# EAGLE board ORIGINAL (EAGLE 9.5.2)
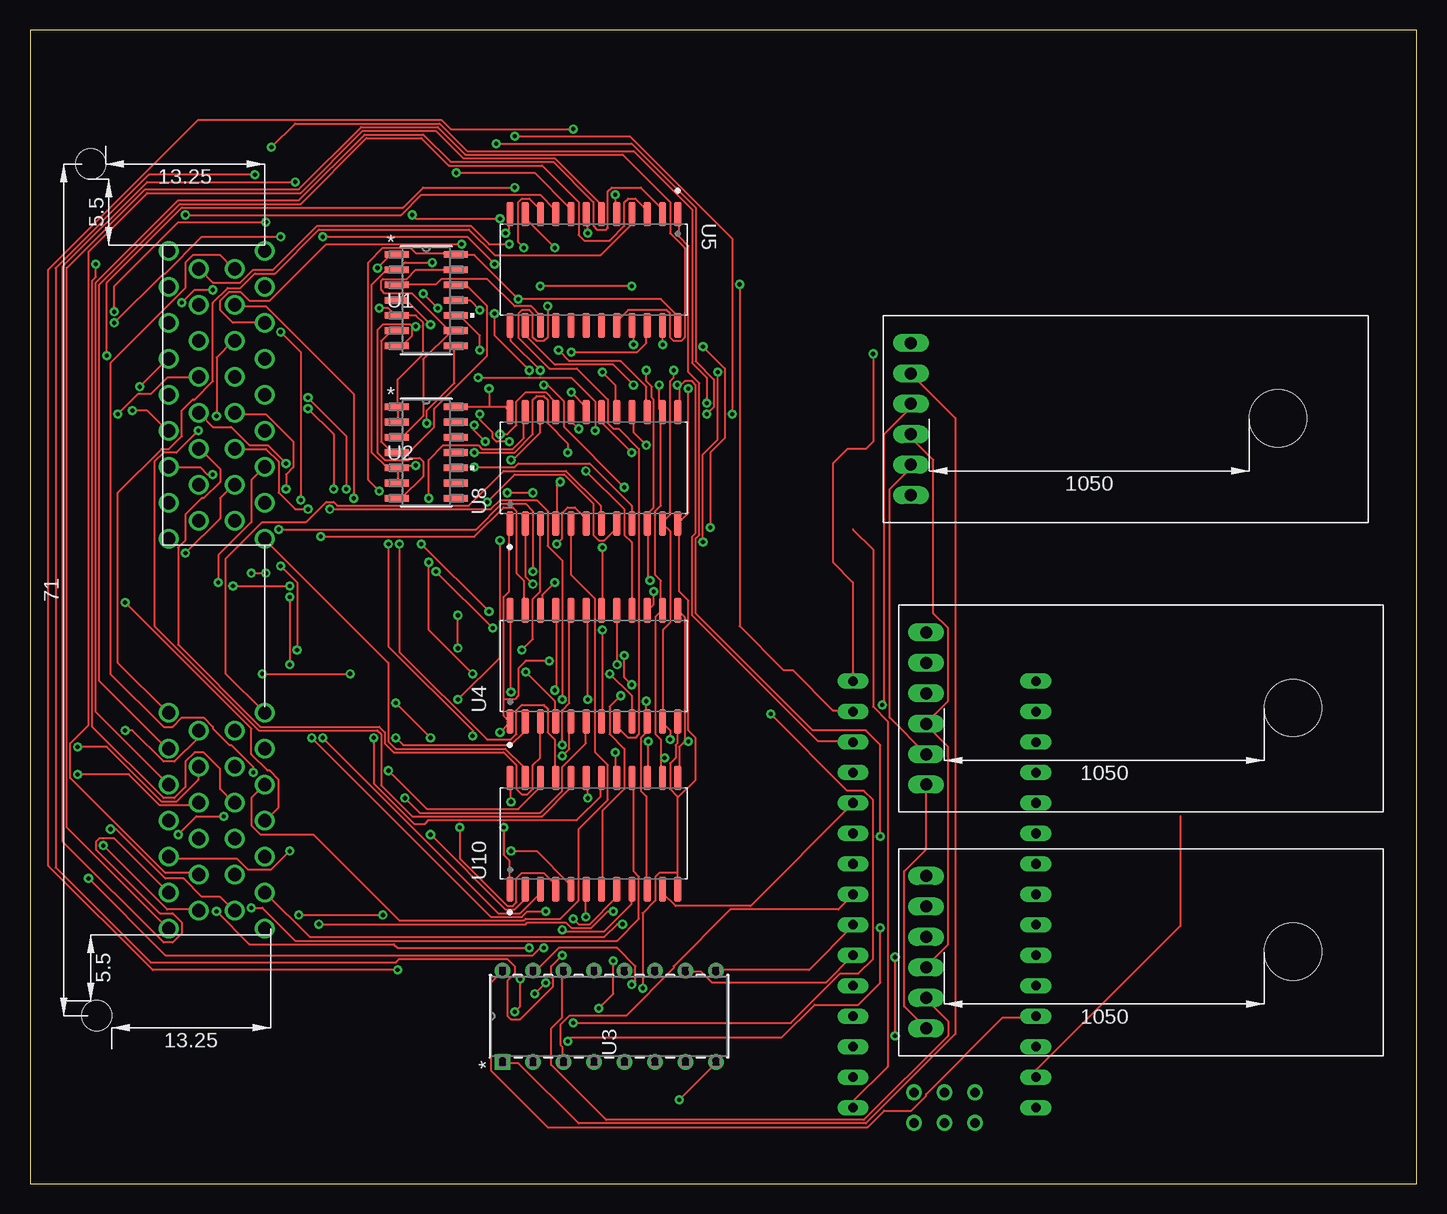
[diagram p0: board, top side]
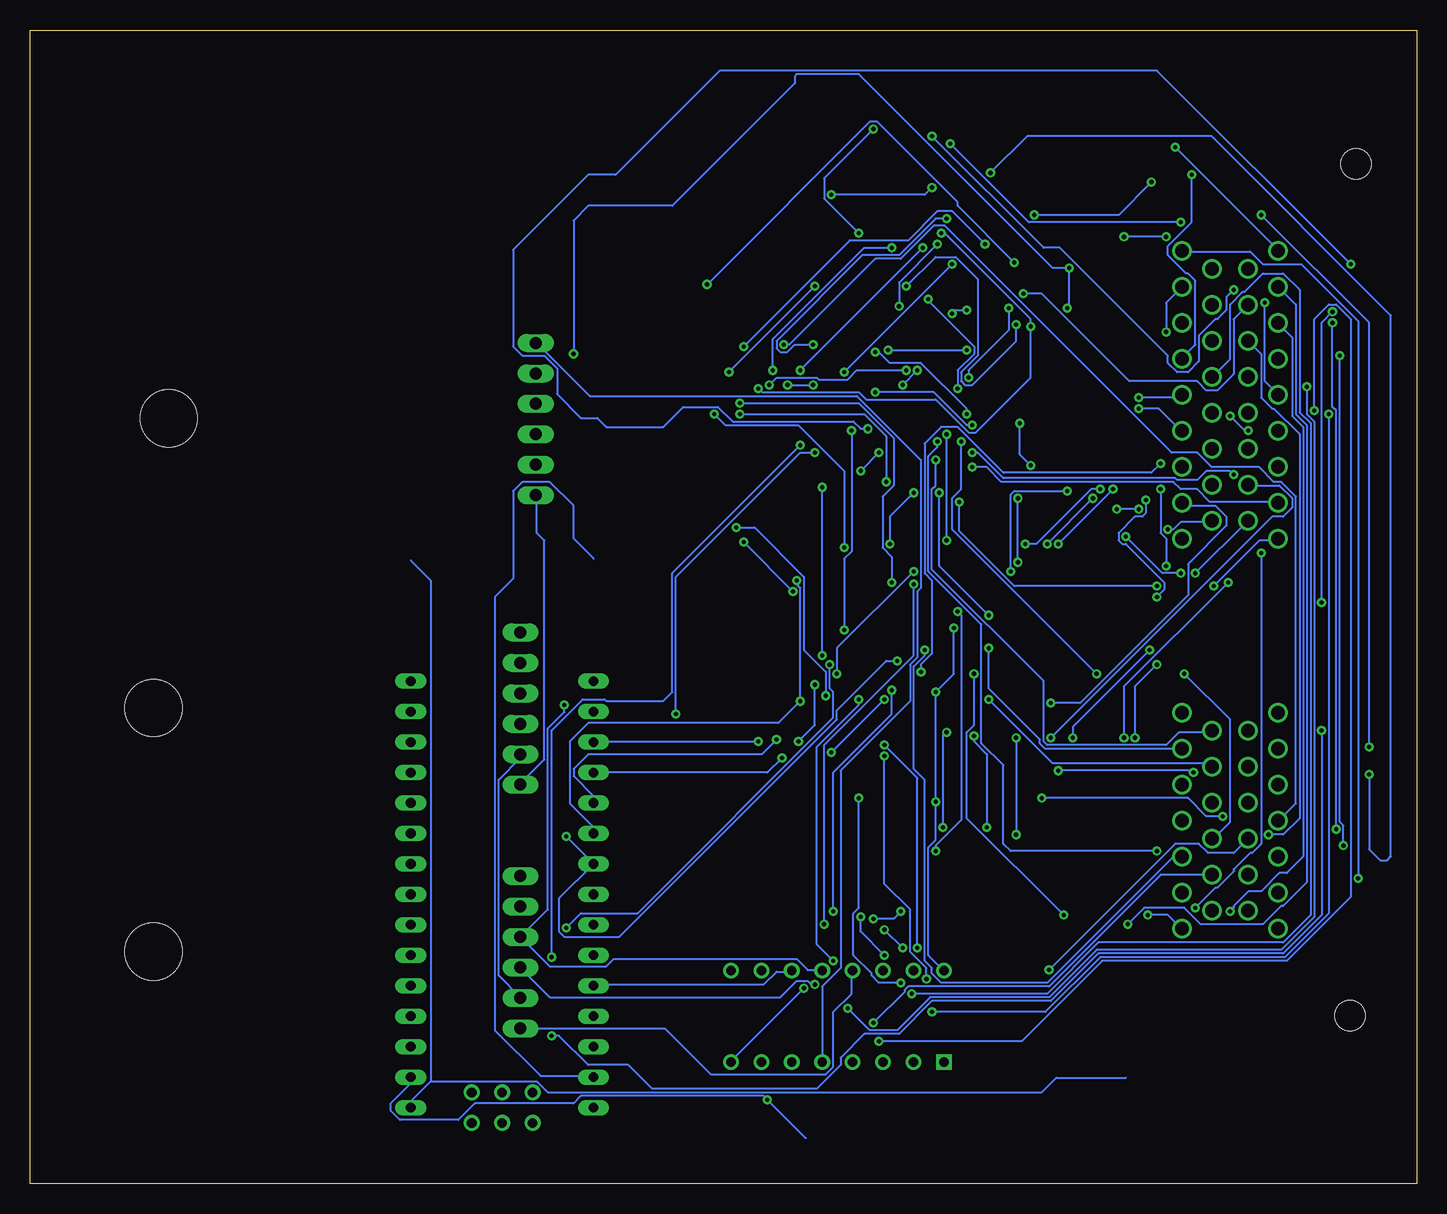
[diagram p1: board, bottom side, seen from below]

Size 115.55 x 96.19 mm. Coordinates in mm from the lower left corner, seen from the top.
Outline: 0,0 115.55,0 115.55,96.19 0,96.19 0,0
Copper layers (1*16): Top 0.035mm / dielectric 1.5mm / Bottom 0.035mm
Design rules "default": minimum track width 6mil, minimum drill 0.35mm, track to track 6mil, track to pad 6mil, pad to pad 6mil, via to via 6mil, smd to smd 6mil, copper to edge 40mil, drill to drill 6mil, minimum pad ring 10mil, minimum via ring 8mil, stop-mask expansion 4mil, vias tented up to drill 0mil, thermal gap 10mil

## Footprints (pad centres in the part's own frame; a part is rotated, then mirrored left to right if it is on the bottom)
D14 = smd 1.981 x 0.559: 1 -2.464,3.81; 2 -2.464,2.54; 3 -2.464,1.27; 4 -2.464,0; 5 -2.464,-1.27; 6 -2.464,-2.54; 7 -2.464,-3.81; 8 2.464,-3.81; 9 2.464,-2.54; 10 2.464,-1.27; 11 2.464,0; 12 2.464,1.27; 13 2.464,2.54; 14 2.464,3.81
N16 = drill 0.787 pad 1.295 square: 1 -7.62,17.78 | drill 0.787 pad 1.295: 2 -7.62,15.24; 3 -7.62,12.7; 4 -7.62,10.16; 5 -7.62,7.62; 6 -7.62,5.08; 7 -7.62,2.54; 8 -7.62,0; 9 0,0; 10 0,2.54; 11 0,5.08; 12 0,7.62; 13 0,10.16; 14 0,12.7; 15 0,15.24; 16 0,17.78
SOIC127P1030X265-24N = smd 2.06 x 0.6: 1 -4.64,6.985; 2 -4.64,5.715; 3 -4.64,4.445; 4 -4.64,3.175; 5 -4.64,1.905; 6 -4.64,0.635; 7 -4.64,-0.635; 8 -4.64,-1.905; 9 -4.64,-3.175; 10 -4.64,-4.445; 11 -4.64,-5.715; 12 -4.64,-6.985; 13 4.64,-6.985; 14 4.64,-5.715; 15 4.64,-4.445; 16 4.64,-3.175; 17 4.64,-1.905; 18 4.64,-0.635; 19 4.64,0.635; 20 4.64,1.905; 21 4.64,3.175; 22 4.64,4.445; 23 4.64,5.715; 24 4.64,6.985
NANO = drill 0.8 long: 3.3V -10.16,24.13; 5V -10.16,-1.27; A0 -10.16,19.05; A1 -10.16,16.51; A2 -10.16,13.97; A3 -10.16,11.43; A4 -10.16,8.89; A5 -10.16,6.35; A6 -10.16,3.81; A7 -10.16,1.27; AREF -10.16,21.59; D2 5.08,1.27; D3 5.08,3.81; D4 5.08,6.35; D5 5.08,8.89; D6 5.08,11.43; D7 5.08,13.97; D8 5.08,16.51; D9 5.08,19.05; D10 5.08,21.59; D11 5.08,24.13; D12 5.08,26.67; D13 -10.16,26.67; GND -10.16,-6.35; GND1 5.08,-1.27; RAW -10.16,-8.89; RST -10.16,-3.81; RST1 5.08,-3.81; RX1 5.08,-6.35; TX0 5.08,-8.89 | drill 0.8: ICSP1 -5.08,-10.16; ICSP2 -5.08,-7.62; ICSP3 -2.54,-10.16; ICSP4 -2.54,-7.62; ICSP5 0,-10.16; ICSP6 0,-7.62
DTM_CON_F = drill 1 long: 1 19.304,6.096; 2 19.304,3.556; 3 19.304,1.016; 4 19.304,-1.524; 5 19.304,-4.064; 6 19.304,-6.604 | hole 4.763: -11.278,-0.305
MOTEC_400_CON_F = drill 1.1: A1 13,-0.5; A2 10,-0.5; A3 7,-0.5; A4 4,-0.5; A5 1,-0.5; A6 -2,-0.5; A7 -5,-0.5; A8 -8,-0.5; A9 -11,-0.5; A10 11.5,2; A11 8.5,2; A12 5.5,2; A13 2.5,2; A14 -0.5,2; A15 -3.5,2; A16 -6.5,2; A17 -9.5,2; A18 11.5,5; A19 8.5,5; A20 5.5,5; A21 2.5,5; A22 -0.5,5; A23 -3.5,5; A24 -6.5,5; A25 -9.5,5; A26 13,7.5; A27 10,7.5; A28 7,7.5; A29 4,7.5; A30 1,7.5; A31 -2,7.5; A32 -5,7.5; A33 -8,7.5; A34 -11,7.5; B1 -25.5,-0.5; B2 -28.5,-0.5; B3 -31.5,-0.5; B4 -34.5,-0.5; B5 -37.5,-0.5; B6 -40.5,-0.5; B7 -43.5,-0.5; B8 -27,2; B9 -30,2; B10 -33,2; B11 -36,2; B12 -39,2; B13 -42,2; B14 -27,5; B15 -30,5; B16 -33,5; B17 -36,5; B18 -39,5; B19 -42,5; B20 -25.5,7.5; B21 -28.5,7.5; B22 -31.5,7.5; B23 -34.5,7.5; B24 -37.5,7.5; B25 -40.5,7.5; B26 -43.5,7.5 | hole 2.5: -50.75,13.5; 20.25,14

## Placement (x,y rotation side)
U1  CD4011BM96  [D14]  33.02,73.66 0 top
U2  CD4011BM96  [D14]  33.02,60.96 0 top
U3  SN74LV4051ANE4  [N16]  57.15,17.78 90 top
U4  CD74HC4067M96  [SOIC127P1030X265-24N]  46.99,43.18 90 top
U5  CD74HC4067M96  [SOIC127P1030X265-24N]  46.99,76.2 270 top
U8  CD74HC4067M96  [SOIC127P1030X265-24N]  46.99,59.69 90 top
U10  CD74HC4067M96  [SOIC127P1030X265-24N]  46.99,29.21 90 top
U$2  NANO  [NANO]  73.66,15.24 0 bottom
U$3  DTM_CON  [DTM_CON_F]  93.98,39.37 180 top
U$5  DTM_CON  [DTM_CON_F]  93.98,19.05 180 top
U$6  DTM_CON  [DTM_CON_F]  92.71,63.5 180 top
U$7  MOTEC_400_CON  [MOTEC_400_CON_F]  19.05,64.77 90 top

## Library data of the parts
U1 U2 = CD4011BM96; MANUFACTURER_PART_NUMBER: CD4011BM96; VENDOR: Texas Instruments
U3 = SN74LV4051ANE4; MANUFACTURER_PART_NUMBER: SN74LV4051ANE4; VENDOR: Texas Instruments
U4 U5 U8 U10 = CD74HC4067M96; AVAILABILITY: Unavailable; DESCRIPTION: High Speed CMOS 16-Channel Analog Multiplexer/Demultiplexer 24-SOIC -55 to 125; MF: Texas Instruments; MP: CD74HC4067M96; PACKAGE: SOIC-24 Texas Instruments; PRICE: None
U$2 = Arduino-clone
U$3 U$5-U$7 = ECU_CHECK_LIB

## Nets
5V2: U1.14 U2.14 U3.16 U4.24 U5.24 U8.24 U10.24 U$2.5V
8_COM: U3.3 U$2.D5
8_IO1: U3.13 U$3.1 U$5.1 U$6.1
8_IO2: U3.14 U$3.2 U$5.2 U$6.2
8_IO3: U3.15 U$3.3 U$5.3 U$6.3
8_IO4: U3.12 U$5.4 U$6.4
8_IO5: U3.1 U$6.5
8_IO6: U3.5 U$6.6
8_SEL_1: U3.11 U$2.D2
8_SEL_2: U3.10 U$2.D3
8_SEL_3: U3.9 U$2.D4
16_IN: U4.1 U5.1 U8.1 U10.1 U$2.D6
16_IO1: U10.9 U$7.A1
16_IO2: U10.8 U$7.A2
16_IO3: U10.7 U$7.A3
16_IO4: U10.6 U$7.A4
16_IO5: U10.5 U$7.A5
16_IO6: U10.4 U$7.A6
16_IO7: U10.3 U$7.A7
16_IO8: U10.2 U$7.A8
16_IO9: U10.23 U$7.A9
16_IO10: U10.22 U$7.A10
16_IO11: U10.21 U$7.A11
16_IO12: U10.20 U$7.A12
16_IO13: U10.19 U$7.A13
16_IO14: U10.18 U$7.A14
16_IO15: U10.17 U$7.A15
16_IO16: U10.16 U$7.A16
16_IO17: U4.9 U$7.A17
16_IO18: U4.8 U$7.A18
16_IO19: U4.7 U$7.A19
16_IO20: U4.6 U$7.A20
16_IO21: U4.5 U$7.A21
16_IO22: U4.4 U$7.A22
16_IO23: U4.3 U$7.A23
16_IO24: U4.2 U$7.A24
16_IO25: U4.23 U$7.A25
16_IO26: U4.22 U$7.A26
16_IO27: U4.21 U$7.A27
16_IO28: U4.20 U$7.A28
16_IO29: U4.19 U$7.A29
16_IO30: U4.18 U$7.A30
16_IO31: U4.17 U$7.A31
16_IO32: U4.16 U$7.A32
16_IO33: U8.9 U$7.A33
16_IO34: U8.8 U$7.A34
16_IO35: U8.7 U$7.B1
16_IO36: U8.6 U$7.B2
16_IO37: U8.5 U$7.B3
16_IO38: U8.4 U$7.B4
16_IO39: U8.3 U$7.B5
16_IO40: U8.2 U$7.B6
16_IO41: U8.23 U$7.B7
16_IO42: U8.22 U$7.B8
16_IO43: U8.21 U$7.B9
16_IO44: U8.20 U$7.B10
16_IO45: U8.19 U$7.B11
16_IO46: U8.18 U$7.B12
16_IO47: U8.17 U$7.B13
16_IO48: U8.16 U$7.B14
16_IO49: U5.9 U$7.B15
16_IO50: U5.8 U$7.B16
16_IO51: U5.7 U$7.B17
16_IO52: U5.6 U$7.B18
16_IO53: U5.5 U$7.B19
16_IO54: U5.4 U$7.B20
16_IO55: U5.3 U$7.B21
16_IO56: U5.2 U$7.B22
16_IO57: U5.23 U$7.B23
16_IO58: U5.22 U$7.B24
16_IO59: U5.21 U$7.B25
16_IO60: U5.20 U$7.B26
16_SEL_1: U4.10 U5.10 U8.10 U10.10 U$2.D7
16_SEL_2: U4.11 U5.11 U8.11 U10.11 U$2.D8
16_SEL_3: U4.14 U5.14 U8.14 U10.14 U$2.D9
16_SEL_4: U4.13 U5.13 U8.13 U10.13 U$2.D10
D11: U1.2 U1.8 U2.5 U2.6 U$2.D11
D12: U1.1 U1.5 U2.1 U2.2 U$2.D12
D12|D11: U1.11 U10.15
GND: U1.7 U2.7 U3.8 U4.12 U5.12 U8.12 U10.12 U$2.GND
GND_2: U3.7
NAND(D11,D12): U1.3 U5.15
NAND(D12,~D11): U1.4 U4.15
NAND(~D12,D11): U1.10 U8.15
RX: U$2.TX0
TX: U$2.RX1
VCC: U$2.RAW
~D11: U1.6 U1.12 U2.4
~D12: U1.9 U1.13 U2.3

## Tracks (layer width: path | path; a pad name or v marks a point on that pad's centre or on a via)
5V2  (via drill 0.35)
  Top 0.152: 38.25,64.77 39.62,64.77 39.93,64.47 U8.24 | 38.25,64.77 U2.14 | U5.24 53.95,71.63 53.95,72.39 52.58,73.76 v40.69,73.76 37.03,77.42 35.51,77.42 U1.14 35.36,77.57 32.16,77.57 31.7,78.03 29.41,78.03 28.19,76.81 28.19,58.67 v29.11,57.76 | v38.25,66.29 38.25,64.77 | v40.08,31.85 40.08,33.83 U10.24 | v40.08,41 40.08,47.7 U4.24 | U$2.5V 83.82,13.87 81.08,13.87 74.68,7.47 74.68,7.32 73.46,6.1 71.17,6.1 69.8,4.72 43.13,4.72 38.41,9.45 38.41,16.76 39.32,17.68 U3.16 | v38.56,46.33 v33.83,51.05
  Bottom 0.152: v38.25,66.29 38.25,67.82 36.88,69.19 36.88,69.8 40.69,73.61 v40.69,73.76 | U3.16 39.47,17.83 40.69,19.05 40.69,28.04 40.08,28.65 v40.08,31.85 v40.08,41 38.56,42.52 v38.56,46.33 | v29.11,57.76 33.53,57.76 33.83,57.45 v33.83,51.05
8_COM
  Top 0.152: U3.3 44.35,10.21 44.35,11.43 44.2,11.58 44.2,13.26 44.96,14.02 49.68,14.02 53.65,17.98 53.65,18.14 58.37,22.86 67.36,22.86 68.58,24.08 U$2.D5
8_IO1
  Top 0.152: U$3.1 74.68,27.89 72.85,26.06 72.85,14.78 U$5.1
  Bottom 0.152: U$5.1 62.64,12.95 58.83,9.14 49.23,9.14 48.62,9.75 48.62,14.33 47.09,15.85 47.09,17.68 U3.13 | U$6.1 73.3,57.3 73.3,54.25 72.69,53.65 72.69,35.36 74.68,33.38 U$3.1
8_IO2
  Top 0.152: U3.14 44.35,17.68 44.35,13.87 43.43,12.95 43.43,9.91 48.01,5.33 69.49,5.33 76.5,12.34 76.5,13.56 74.68,15.39 U$5.2 | U$3.2 71.63,38.86 71.63,57.91 73.3,59.59 73.3,59.89 U$6.2
  Bottom 0.152: U$3.2 74.68,35.51 76.5,33.68 76.5,17.37 74.68,15.54 U$5.2
8_IO3  (via drill 0.35)
  Top 0.152: v50.14,16.61 50.44,16.92 50.44,18.14 48.92,19.66 44.04,19.66 42.22,17.83 41.91,17.83 U3.15 | U$5.3 74.68,18.14 76.5,19.96 76.5,36.42 74.68,38.25 U$3.3 74.68,38.41 76.5,40.23 76.5,46.33 75.29,47.55 75.29,60.35 73.46,62.18 73.46,62.48 U$6.3
  Bottom 0.152: v50.14,16.61 50.44,16.61 50.75,16.92 51.66,16.92 53.03,15.54 72.24,15.54 74.68,17.98 U$5.3
8_IO4  (via drill 0.35)
  Top 0.152: v71.02,39.93 71.17,40.08 71.17,62.48 73.3,64.62 73.3,64.92 U$6.4
  Bottom 0.152: U3.12 49.53,17.83 50.75,17.83 51.66,18.75 66.9,18.75 67.51,18.14 72.24,18.14 U$5.4 72.39,22.86 72.39,37.95 71.02,39.32 v71.02,39.93
8_IO5
  Top 0.152: U$6.5 77.11,63.86 77.11,12.5 69.65,5.03 45.72,5.03 40.69,10.06 39.47,10.06 U3.1
8_IO6
  Bottom 0.152: U3.5 49.53,16.46 48.01,17.98 48.01,34.44 42.22,40.23 42.22,43.28 41.6,43.89 41.6,49.38 41.3,49.68 41.3,60.35 46.63,65.68 68.89,65.68 73.3,70.1 U$6.6
8_SEL_1
  Bottom 0.152: U3.11 52.12,17.68 53.34,17.68 54.41,16.61 68.58,16.61 U$2.D2
8_SEL_2
  Top 0.152: U$2.D3 66.29,16.76 56.84,16.76 55.93,17.68 54.71,17.68 U3.10
8_SEL_3
  Top 0.152: U3.9 57.15,17.83 64.92,17.83 68.58,21.49 U$2.D4
16_IN  (via drill 0.35)
  Top 0.152: v39.47,29.72 39.47,27.43 39.93,26.98 39.93,24.69 U10.1 | v39.17,37.64 39.93,38.41 U4.1 39.93,38.56 39.47,39.01 39.47,40.39 | 39.47,40.39 39.47,48.92 39.93,49.38 39.93,55.02 U8.1 | v70.87,28.96 70.87,36.58 69.65,37.8 65.23,37.8 55.47,47.55 55.47,53.8 55.78,54.1 55.78,66.75 54.86,67.67 54.86,78.18 54.1,78.94 54.1,80.77 U5.1 | 39.47,40.39 40.39,40.39 40.69,40.69 40.69,42.98 41.3,43.59 v43.28,43.59
  Bottom 0.152: v39.47,29.72 39.47,37.34 v39.17,37.64 | v70.87,28.96 U$2.D6 71.48,23.77 71.48,21.03 71.02,20.57 66.45,20.57 48.31,38.71 48.31,39.47 44.2,43.59 v43.28,43.59
16_IO1  (via drill 0.35)
  Top 0.152: v44.35,21.18 44.5,21.03 47.85,21.03 50.14,23.32 50.14,24.54 U10.9 | v42.82,19.66 42.52,19.66 41.91,19.05 11.28,19.05 v4.88,25.45
  Bottom 0.152: v42.82,19.66 v44.35,21.18 | v4.88,25.45 4.88,71.93 9.6,76.66 12.8,76.66 13.87,77.72 19.51,77.72 U$7.A1
16_IO2  (via drill 0.35)
  Top 0.152: v45.26,22.1 45.72,21.64 46.63,21.64 48.77,23.77 48.77,24.54 U10.8 | v42.98,22.71 41.45,22.71 41,22.25 38.41,22.25 v23.47,37.19 | v21.64,48.92 v21.64,43.28 | v22.55,57 22.55,69.34 v20.88,71.02
  Bottom 0.152: v45.26,22.1 43.59,22.1 v42.98,22.71 | v23.47,37.19 23.47,41.45 v21.64,43.28 | v21.64,48.92 21.03,49.53 21.03,50.14 24.23,53.34 24.54,53.34 24.84,53.65 24.84,54.25 23.47,55.63 22.86,55.63 22.55,55.93 v22.55,57 | v20.88,71.02 20.88,73.46 19.66,74.68 U$7.A2
16_IO3  (via drill 0.35)
  Top 0.152: v49.23,40.69 48.31,39.78 48.31,37.49 49.53,36.27 49.53,32.92 47.7,31.09 47.7,24.69 U10.7 | v56.69,54.71 56.69,60.96 57.91,62.18 57.91,67.97 v56.08,69.8 | v35.97,78.33 24.69,78.33 19.96,73.61 18.29,73.61 17.53,74.37 16.61,74.37 15.85,73.61 15.85,72.85 16.92,71.78 19.51,71.78 U$7.A3
  Bottom 0.152: v49.23,40.69 49.23,42.67 51.05,44.5 51.05,50.6 55.17,54.71 v56.69,54.71 | v56.08,69.8 47.24,78.64 42.37,78.64 39.93,81.08 38.71,81.08 v35.97,78.33
16_IO4  (via drill 0.35)
  Top 0.152: v46.33,22.25 46.33,24.54 U10.6 | v44.35,19.05 43.43,18.14 43.43,17.22 43.59,17.07 43.59,16.46 40.84,13.72 40.08,13.72 39.78,14.02 39.78,16.92 40.39,17.53 40.39,18.14 39.78,18.75 30.79,18.75 30.48,18.44 10.06,18.44 2.13,26.36 2.13,76.35 9.91,84.12 v18.75,84.12
  Bottom 0.152: v46.33,22.25 46.33,21.03 v44.35,19.05 | v18.75,84.12 18.75,80.16 20.73,78.18 20.73,77.42 19.2,75.89 19.05,75.89 18.44,75.29 18.44,69.95 19.51,68.89 U$7.A4
16_IO5  (via drill 0.35)
  Top 0.152: v40.08,27.74 42.22,27.74 44.96,24.99 44.96,24.69 U10.5 | v32.61,53.34 v38.25,47.7 | v26.36,57.91 26.36,62.33 v23.16,65.53
  Bottom 0.152: v40.08,27.74 40.08,28.19 37.95,30.33 37.95,47.4 v38.25,47.7 | v32.61,53.34 31.7,53.34 27.13,57.91 v26.36,57.91 | v23.16,65.53 19.81,65.53 19.66,65.68 U$7.A5
16_IO6  (via drill 0.35)
  Top 0.152: v35.81,29.72 35.81,27.13 39.78,23.16 40.23,23.16 40.54,23.47 40.54,25.45 41,25.91 42.82,25.91 43.74,24.99 43.74,24.69 U10.4 | v36.88,37.34 36.88,37.8 29.87,44.81 v29.87,53.34 | v25.3,57.91 25.3,62.48 v23.16,64.62
  Bottom 0.152: v35.81,29.72 35.81,35.81 36.88,36.88 v36.88,37.34 | v25.3,57.91 v29.87,53.34 | v23.16,64.62 21.49,64.62 19.66,62.79 U$7.A6
16_IO7  (via drill 0.35)
  Top 0.152: v24.38,37.19 39.01,22.55 40.84,22.55 42.52,24.23 42.52,24.54 U10.3 | v15.7,50.14 15.7,52.43 18.44,55.17 18.44,58.67 19.51,59.74 U$7.A7
  Bottom 0.152: v24.38,37.19 24.38,41.45 v15.7,50.14
16_IO8  (via drill 0.35)
  Top 0.152: v33.38,29.11 39.62,22.86 40.39,22.86 41.15,23.62 41.15,24.54 U10.2 | v30.48,40.08 v33.38,37.19
  Bottom 0.152: v33.38,37.19 v33.38,29.11 | v30.48,40.08 28.04,40.08 19.05,49.07 19.05,51.66 15.85,54.86 15.85,55.63 16.76,56.54 19.36,56.54 19.51,56.69 U$7.A8
16_IO9
  Top 0.152: U10.23 41.15,33.98 41.15,34.75 39.62,36.27 30.48,36.27 29.87,36.88 29.87,43.43 19.66,53.65 U$7.A9
16_IO10  (via drill 0.35)
  Top 0.152: v29.87,34.44 33.07,31.24 40.69,31.24 42.52,33.07 42.52,33.83 U10.22 | v18.59,34.29 18.59,34.75 16.76,36.58 16.61,36.58 15.24,37.95 15.24,38.1 14.48,38.86 12.65,38.86 11.89,38.1 11.12,38.1 6.71,42.52 6.71,68.43 12.95,74.68 12.95,76.81 13.56,77.42 15.85,77.42 16.92,76.35 U$7.A10
  Bottom 0.152: v29.87,34.44 18.75,34.44 v18.59,34.29
16_IO11  (via drill 0.35)
  Top 0.152: v30.79,53.34 30.79,44.35 38.1,37.03 40.08,37.03 40.54,37.49 40.54,39.47 41,39.93 42.82,39.93 43.13,39.62 43.13,37.64 43.74,37.03 43.74,33.98 U10.21 | v26.98,57.15 26.98,65.84 19.66,73.15 17.07,73.15 U$7.A11
  Bottom 0.152: v26.98,57.15 v30.79,53.34
16_IO12  (via drill 0.35)
  Top 0.152: v14.02,62.79 12.19,60.96 11.12,60.96 10.36,60.2 10.36,46.48 19.05,37.8 28.96,37.8 29.26,37.49 29.26,33.22 31.85,30.63 42.67,30.63 44.96,32.92 44.96,33.83 U10.20 | v15.54,64.01 15.54,68.89 16.92,70.26 U$7.A12
  Bottom 0.152: v14.02,62.79 14.33,62.79 v15.54,64.01
16_IO13  (via drill 0.35)
  Top 0.152: v46.48,32.16 46.48,33.83 U10.19 | v42.06,15.85 v42.98,16.76
  Bottom 0.152: v46.48,32.16 46.48,23.01 46.94,22.55 46.94,19.05 45.41,17.53 45.41,17.37 44.81,16.76 v42.98,16.76 | v42.06,15.85 30.79,15.85 26.52,20.12 11.12,20.12 8.84,22.4 8.84,63.4 9.75,64.31 9.75,74.52 11.12,75.89 12.8,75.89 14.33,74.37 14.48,74.37 15.54,73.3 15.54,68.73 16.92,67.36 U$7.A13
16_IO14  (via drill 0.35)
  Top 0.152: v28.65,37.19 28.65,33.38 32,30.02 32.92,30.02 33.22,30.33 45.57,30.33 47.55,32.31 47.55,33.83 U10.18 | v22.25,44.5 22.25,50.14 v20.88,51.51 | v21.34,57.91 21.34,59.13 21.95,59.74 21.95,61.87 19.66,64.16 17.07,64.16 U$7.A14
  Bottom 0.152: v28.65,37.19 28.65,38.1 v22.25,44.5 | v20.88,51.51 20.88,53.8 21.34,54.25 v21.34,57.91
16_IO15  (via drill 0.35)
  Top 0.152: v48.77,35.97 48.77,33.98 U10.17 | v44.35,40.39 44.35,51.97 43.13,53.19 43.13,56.08 42.22,57 39.17,57 38.41,56.24 v24.99,56.24 | v23.16,56.24 22.1,56.24 20.73,57.61 20.73,60.2 19.66,61.27 17.07,61.27 U$7.A15
  Bottom 0.152: v44.35,40.39 v48.77,35.97 | v23.16,56.24 v24.99,56.24
16_IO16  (via drill 0.35)
  Top 0.152: v18.44,23.01 19.36,23.01 22.1,20.27 48.92,20.27 50.75,22.1 50.75,25.6 50.29,26.06 50.29,33.83 U10.16 | v12.95,52.58 15.85,55.47 15.85,57.15 16.92,58.22 U$7.A16
  Bottom 0.152: v18.44,23.01 16.76,24.69 16.61,24.69 15.24,26.06 15.24,26.21 13.87,27.58 13.72,27.58 12.95,28.35 v12.95,52.58
16_IO17  (via drill 0.35)
  Top 0.152: v48.31,42.52 50.14,40.69 50.14,38.56 U4.9 | v41.91,51.05 41.91,56.08 41.3,56.69 39.32,56.69 37.19,54.56 v20.73,54.56
  Bottom 0.152: v48.31,42.52 48.31,44.65 v41.91,51.05 | v20.73,54.56 20.27,54.56 19.66,55.17 17.07,55.17 U$7.A17
16_IO18  (via drill 0.35)
  Top 0.152: v43.13,73.15 43.13,70.56 42.82,70.26 42.22,70.26 41.91,70.56 41.91,72.54 41.6,72.85 41,72.85 40.69,72.54 40.69,70.56 43.28,67.97 45.57,67.97 48.16,65.38 48.16,63.4 48.62,62.94 49.07,62.94 50.75,61.27 50.75,37.49 50.44,37.19 49.84,37.19 48.92,38.1 48.92,38.41 U4.8 | v39.93,78.33 38.25,78.33 36.73,79.86 23.93,79.86 20.27,76.2 18.59,76.2 17.53,75.13 15.24,75.13 14.17,76.2 U$7.A18
  Bottom 0.152: v43.13,73.15 43.13,75.13 v39.93,78.33
16_IO19  (via drill 0.35)
  Top 0.152: v47.7,46.18 47.7,38.56 U4.7 | v47.09,62.79 47.09,65.23 45.11,67.21 v37.34,67.21 | v32.77,74.22 v33.98,73
  Bottom 0.152: v47.7,46.18 47.7,52.12 47.09,52.73 v47.09,62.79 | v37.34,67.21 37.34,67.82 33.98,71.17 v33.98,73 | v32.77,74.22 31.24,74.22 23.93,66.9 18.29,66.9 17.53,66.14 16.61,66.14 15.24,67.51 15.24,72.08 14.17,73.15 U$7.A19
16_IO20  (via drill 0.35)
  Top 0.152: v31.24,32.16 32.46,30.94 42.52,30.94 44.35,32.77 44.35,34.75 46.33,36.73 46.33,38.41 U4.6 | v16.15,30.63 13.87,30.63 v12.34,29.11
  Bottom 0.152: v31.24,32.16 19.05,32.16 17.53,30.63 v16.15,30.63 | v12.34,29.11 11.12,29.11 9.75,30.48 9.75,62.48 11.89,64.62 12.04,64.62 12.95,65.53 12.95,69.19 14.02,70.26 U$7.A20
16_IO21  (via drill 0.35)
  Top 0.152: v44.35,35.66 44.96,36.27 44.96,38.41 U4.5 | v40.84,17.07 40.84,14.78 v40.39,14.33 | v7.32,64.16 8.99,65.84 10.06,65.84 11.43,67.21 14.02,67.21 U$7.A21
  Bottom 0.152: v44.35,35.66 44.35,24.99 42.22,22.86 42.22,19.36 40.84,17.98 v40.84,17.07 | v40.39,14.33 30.94,14.33 26.36,18.9 10.97,18.9 7.32,22.55 v7.32,64.16
16_IO22  (via drill 0.35)
  Top 0.152: v41.3,42.67 43.74,40.23 43.74,38.56 U4.4 | v21.34,60.05 19.81,61.57 18.29,61.57 16.76,63.09 15.24,63.09 14.17,64.16 U$7.A22
  Bottom 0.152: v41.3,42.67 41.3,43.28 40.39,44.2 40.39,50.29 41,50.9 41,61.72 39.62,63.09 38.25,63.09 34.44,59.28 22.1,59.28 v21.34,60.05
16_IO23
  Top 0.152: U4.3 42.52,38.41 42.52,35.51 41.91,34.9 41.91,32.92 41.45,32.46 41,32.46 40.54,32.92 40.54,34.9 39.47,35.97 30.33,35.97 29.57,36.73 29.57,37.64 29.11,38.1 19.2,38.1 12.34,44.96 12.34,53.03 12.95,53.65 12.95,55.78 14.33,57.15 14.48,57.15 15.85,58.52 15.85,59.59 14.17,61.27 U$7.A23
16_IO24  (via drill 0.35)
  Top 0.152: v30.48,37.19 31.09,36.58 40.08,36.58 41.15,37.64 41.15,38.41 U4.2
  Bottom 0.152: v30.48,37.19 12.04,55.63 11.12,55.63 10.36,56.39 10.36,57.15 11.43,58.22 14.02,58.22 U$7.A24
16_IO25  (via drill 0.35)
  Top 0.152: v24.23,53.95 37.03,53.95 39.47,56.39 40.23,56.39 40.54,56.08 40.54,50.9 41.15,50.29 41.15,47.85 U4.23 | v18.44,50.9 v19.66,50.9
  Bottom 0.152: v24.23,53.95 21.18,50.9 v19.66,50.9 | v18.44,50.9 14.17,55.17 U$7.A25
16_IO26  (via drill 0.35)
  Top 0.152: v43.74,50.14 42.67,49.07 42.67,47.85 U4.22 | v56.39,65.08 56.39,67.21 55.17,68.43 55.17,81.23 50.29,86.11 36.42,86.11 34.14,88.39 22.1,88.39 v20.12,86.41
  Bottom 0.152: v43.74,50.14 43.74,52.27 44.5,53.03 44.5,57.3 43.59,58.22 43.59,62.18 46.48,65.08 v56.39,65.08 | v20.12,86.41 11.58,77.88 U$7.A26
16_IO27  (via drill 0.35)
  Top 0.152: v43.74,41.15 43.89,41.3 43.89,47.7 U4.21 | v48.62,22.71 48.16,22.71 46.79,21.34 45.11,21.34 44.65,21.79 41.45,21.79 41.3,21.64 v24.08,21.64
  Bottom 0.152: v43.74,41.15 43.74,39.17 48.62,34.29 v48.62,22.71 | v24.08,21.64 22.71,23.01 19.36,23.01 17.98,21.64 12.8,21.64 11.28,23.16 11.12,23.16 9.14,25.15 9.14,63.25 10.06,64.16 10.06,73.3 11.43,74.68 U$7.A27
16_IO28  (via drill 0.35)
  Top 0.152: v44.35,36.58 44.35,39.47 44.96,40.08 44.96,47.7 U4.20 | v41.6,19.66 30.63,19.66 30.33,19.96 18.29,19.96 v15.54,22.71
  Bottom 0.152: v44.35,36.58 41.6,33.83 v41.6,19.66 | v15.54,22.71 15.24,23.01 15.24,23.16 14.02,24.38 12.95,24.38 11.43,25.91 10.82,25.91 9.45,27.28 9.45,63.09 10.36,64.01 10.36,70.56 11.43,71.63 U$7.A28
16_IO29  (via drill 0.35)
  Top 0.152: v46.48,40.39 46.48,47.7 U4.19 | v48.62,18.59 48.62,15.85 v47.4,14.63 | v9.14,66.45 11.43,68.73 U$7.A29
  Bottom 0.152: v46.48,40.39 46.48,39.93 49.99,36.42 49.99,19.96 v48.62,18.59 | v47.4,14.63 45.57,12.8 43.28,12.8 40.54,15.54 30.63,15.54 26.67,19.51 11.28,19.51 8.53,22.25 8.53,63.55 9.14,64.16 v9.14,66.45
16_IO30  (via drill 0.35)
  Top 0.152: v47.7,53.03 47.7,47.85 U4.18 | v58.52,64.16 58.52,78.79 49.99,87.33 v40.39,87.33 | v15.24,74.52 13.72,74.52 v12.65,73.46
  Bottom 0.152: v47.7,53.03 47.7,59.44 51.51,63.25 57.61,63.25 v58.52,64.16 | v40.39,87.33 31.09,78.03 29.72,78.03 20.73,69.04 20.73,68.43 19.96,67.67 19.05,67.67 18.14,68.58 18.14,70.71 16.76,72.08 16.61,72.08 15.85,72.85 15.85,73.91 v15.24,74.52 | v12.65,73.46 12.65,66.9 11.58,65.84 U$7.A30
16_IO31  (via drill 0.35)
  Top 0.152: v48.92,43.28 48.92,47.7 U4.17 | v70.87,21.34 70.87,16.76 69.04,14.94 65.38,14.94 62.64,12.19 45.11,12.19 v44.81,11.89 | v8.53,64.47 9.75,64.47 11.43,62.79 U$7.A31
  Bottom 0.152: v48.92,43.28 48.92,41.3 48.62,41 48.62,38.86 64.92,22.55 69.65,22.55 v70.87,21.34 | v44.81,11.89 32.92,11.89 26.21,18.59 10.82,18.59 5.49,23.93 5.49,72.08 6.71,73.3 7.32,73.3 8.53,72.08 v8.53,64.47
16_IO32  (via drill 0.35)
  Top 0.152: v46.33,59.44 49.53,56.24 49.53,54.1 50.14,53.49 50.14,47.85 U4.16 | v44.81,60.96 44.81,61.72 43.13,63.4 43.13,65.38 42.82,65.68 42.22,65.68 41.91,65.38 41.91,62.48 40.39,60.96 v37.03,60.96 | v15.24,59.13 14.78,59.13 14.17,59.74 11.58,59.74 U$7.A32
  Bottom 0.152: v44.81,60.96 v46.33,59.44 | v37.03,60.96 36.58,60.96 34.44,58.83 20.12,58.83 19.96,58.67 18.29,58.67 17.53,59.44 15.54,59.44 v15.24,59.13
16_IO33  (via drill 0.35)
  Top 0.152: v37.03,59.74 40.39,59.74 40.69,60.05 46.63,60.05 50.14,56.54 50.14,55.17 U8.9
  Bottom 0.152: v37.03,59.74 35.81,59.74 34.59,58.52 20.27,58.52 19.66,57.91 18.29,57.91 17.22,56.84 11.58,56.84 U$7.A33
16_IO34  (via drill 0.35)
  Top 0.152: v38.1,56.84 40.39,59.13 44.5,59.13 46.94,56.69 46.94,54.1 47.4,53.65 47.85,53.65 48.77,54.56 48.77,55.02 U8.8 | v16.92,49.84 v21.64,49.84
  Bottom 0.152: v38.1,56.84 38.1,54.41 33.53,49.84 v21.64,49.84 | v16.92,49.84 13.11,53.65 11.58,53.65 U$7.A34
16_IO35
  Top 0.152: U8.7 47.55,55.17 47.55,56.54 44.65,59.44 39.47,59.44 36.58,56.54 25.6,56.54 25.3,56.84 24.69,56.84 23.01,55.17 19.36,55.17 16.31,52.12 16.31,42.52 19.51,39.32 U$7.B1
16_IO36  (via drill 0.35)
  Top 0.152: v43.89,53.34 44.35,53.8 44.35,55.93 44.81,56.39 45.41,56.39 46.33,55.47 46.33,55.17 U8.6 | v39.78,57.61 v41.91,57.61 | v35.66,44.65 v35.66,47.4
  Bottom 0.152: v43.89,53.34 43.89,55.63 v41.91,57.61 | v39.78,57.61 39.78,51.51 v35.66,47.4 | v35.66,44.65 35.66,41.3 31.39,37.03 31.39,36.73 30.94,36.27 19.66,36.27 U$7.B2
16_IO37
  Top 0.152: U8.5 45.11,55.02 45.11,50.75 47.09,48.77 47.09,35.97 48.16,34.9 48.16,32 45.72,29.57 45.72,23.62 44.2,22.1 41.3,22.1 41.15,21.95 30.79,21.95 23.62,29.11 19.2,29.11 18.44,29.87 18.44,32.16 19.51,33.22 U$7.B3
16_IO38  (via drill 0.35)
  Top 0.152: v44.2,58.52 43.89,58.22 43.89,55.17 U8.4 | v56.39,64.16 57,64.77 57,67.06 55.47,68.58 55.47,81.38 50.14,86.72 v38.86,86.72 | v19.66,80.16 12.34,80.16 7.01,74.83 v7.01,72.69 | v7.92,48.46 18.44,37.95 18.44,35.81 19.81,34.44 19.96,34.44 20.73,33.68 20.73,31.39 19.66,30.33 U$7.B4
  Bottom 0.152: v44.2,58.52 44.2,62.33 46.02,64.16 v56.39,64.16 | v38.86,86.72 32.31,80.16 v19.66,80.16 | v7.01,72.69 7.92,71.78 v7.92,48.46
16_IO39  (via drill 0.35)
  Top 0.152: v41,44.5 41.91,45.41 41.91,48.77 42.52,49.38 42.52,55.02 U8.3
  Bottom 0.152: v41,44.5 41,44.04 41.91,43.13 41.91,34.59 41,33.68 41,18.59 40.39,17.98 40.39,17.53 39.62,16.76 30.79,16.76 20.42,27.13 19.66,27.13 U$7.B5
16_IO40  (via drill 0.35)
  Top 0.152: v41.91,49.99 41.3,50.6 41.3,55.02 U8.2 | v49.38,21.64 48.92,21.64 47.85,20.57 23.32,20.57 19.66,24.23 U$7.B6
  Bottom 0.152: v41.91,49.99 41.91,44.04 49.38,36.58 v49.38,21.64
16_IO41  (via drill 0.35)
  Top 0.152: v33.22,57.15 33.22,60.35 34.44,61.57 37.34,61.57 37.64,61.27 40.23,61.27 41.15,62.18 41.15,64.31 U8.23 | v33.22,51.82 33.22,46.18 v36.88,42.52 | v22.4,22.4 v29.41,22.4
  Bottom 0.152: v33.22,51.82 v33.22,57.15 | v36.88,42.52 36.88,38.25 37.49,37.64 37.49,30.48 v29.41,22.4 | v22.4,22.4 20.73,22.4 19.66,21.34 U$7.B7
16_IO42  (via drill 0.35)
  Top 0.152: v40.08,60.35 40.23,60.35 42.52,62.64 42.52,64.31 U8.22
  Bottom 0.152: v40.08,60.35 40.08,58.22 40.39,57.91 40.39,51.21 31.09,41.91 31.09,36.88 30.79,36.58 20.88,36.58 19.81,37.64 17.07,37.64 U$7.B8
16_IO43  (via drill 0.35)
  Top 0.152: v39.17,62.48 39.78,62.48 40.54,63.25 40.54,65.23 41.3,65.99 42.98,65.99 43.74,65.23 43.74,64.47 U8.21 | v39.17,53.65 39.17,43.89 v35.66,40.39
  Bottom 0.152: v39.17,53.65 v39.17,62.48 | v35.66,40.39 30.33,35.05 17.22,35.05 17.07,34.9 U$7.B9
16_IO44  (via drill 0.35)
  Top 0.152: v45.72,62.94 45.11,63.55 45.11,64.31 U8.20 | v5.49,76.66 5.49,75.59 5.18,75.29 5.18,38.1 11.12,32.16 12.04,32.16 12.95,33.07 12.95,35.2 13.72,35.97 14.48,35.97 15.85,34.59 15.85,32.92 16.92,31.85 U$7.B10
  Bottom 0.152: v45.72,62.94 46.33,62.94 46.94,63.55 57,63.55 58.22,64.77 61.11,64.77 62.79,63.09 67.51,63.09 68.28,63.86 69.65,63.86 71.63,65.84 71.63,67.97 72.69,69.04 74.52,69.04 75.29,69.8 75.29,77.88 69.04,84.12 66.75,84.12 58.06,92.81 21.64,92.81 v5.49,76.66
16_IO45  (via drill 0.35)
  Top 0.152: v45.11,65.99 46.33,64.77 46.33,64.47 U8.19 | v37.03,63.25 37.03,62.79 v37.95,61.87 | v19.36,42.52 v26.67,42.52
  Bottom 0.152: v45.11,65.99 40.23,65.99 37.49,63.25 v37.03,63.25 | v37.95,61.87 37.95,57.91 38.71,57.15 38.71,54.56 v26.67,42.52 | v19.36,42.52 15.54,38.71 15.54,30.18 16.92,28.8 U$7.B11
16_IO46  (via drill 0.35)
  Top 0.152: v50.14,60.96 47.7,63.4 47.7,64.31 U8.18 | v61.72,39.17 68.12,32.77 69.49,32.77 70.26,32 70.26,18.75 69.04,17.53 67.51,17.53 63.4,13.41 v45.26,13.41
  Bottom 0.152: v50.14,60.96 51.36,60.96 61.72,50.6 v61.72,39.17 | v45.26,13.41 42.67,16 42.67,16.15 42.37,16.46 30.63,16.46 21.34,25.76 17.07,25.76 U$7.B12
16_IO47  (via drill 0.35)
  Top 0.152: v47.7,67.67 48.77,66.6 48.77,64.47 U8.17 | v38.71,76.66 36.42,78.94 v24.38,78.94 | v20.88,78.94 14.33,78.94 11.28,75.89 11.12,75.89 v7.01,71.78 | v6.71,29.57 7.16,29.57 11.28,25.45 12.8,25.45 14.33,23.93 15.85,23.93 16.92,22.86 U$7.B13
  Bottom 0.152: v38.71,76.66 v47.7,67.67 | v20.88,78.94 v24.38,78.94 | v7.01,71.78 7.01,64.77 6.71,64.47 v6.71,29.57
16_IO48  (via drill 0.35)
  Top 0.152: v51.36,61.57 50.29,62.64 50.29,64.31 U8.16 | v72.08,12.34 v72.08,18.9 | v7.92,37.8 8.53,37.8 11.12,35.2 12.04,35.2 14.02,37.19 14.02,37.64 U$7.B14
  Bottom 0.152: v51.36,61.57 62.03,50.9 62.03,41 62.79,40.23 67.51,40.23 67.67,40.39 69.49,40.39 72.08,37.8 v72.08,18.9 | v72.08,12.34 71.48,12.34 69.04,9.91 65.68,9.91 63.7,7.92 49.99,7.92 48.01,9.91 48.01,10.52 46.02,12.5 43.13,12.5 40.39,15.24 30.48,15.24 26.52,19.2 11.12,19.2 7.92,22.4 v7.92,37.8
16_IO49  (via drill 0.35)
  Top 0.152: v12.95,80.77 30.94,80.77 32.61,82.45 42.52,82.45 43.74,81.23 43.74,80.92 U5.9 | v3.96,36.42 6.4,36.42 10.97,31.85 12.19,31.85 14.02,33.68 14.02,34.75 U$7.B15
  Bottom 0.152: v12.95,80.77 3.96,71.78 v3.96,36.42
16_IO50  (via drill 0.35)
  Top 0.152: v35.51,84.28 42.06,84.28 44.96,81.38 44.96,80.92 U5.8 | v3.96,34.14 8.23,34.14 10.82,31.55 13.87,31.55 14.02,31.7 U$7.B16
  Bottom 0.152: v35.51,84.28 32.46,87.33 17.07,87.33 2.13,72.39 2.13,27.28 2.44,26.98 3.05,26.98 3.96,27.89 v3.96,34.14
16_IO51  (via drill 0.35)
  Top 0.152: v46.48,79.25 46.48,80.77 U5.7 | v45.26,87.94 35.05,87.94 34.29,88.7 14.02,88.7 1.52,76.2 1.52,26.52 10.21,17.83 v30.63,17.83
  Bottom 0.152: v46.48,79.25 49.38,82.14 49.38,83.82 v45.26,87.94 | v30.63,17.83 20.12,28.35 18.14,28.35 17.37,27.58 15.24,27.58 14.17,28.65 U$7.B17
16_IO52
  Top 0.152: U5.6 47.55,80.92 47.55,81.69 43.74,85.5 36.12,85.5 33.83,87.78 27.74,87.78 22.55,82.6 9.75,82.6 4.88,77.72 4.88,38.25 3.35,36.73 3.35,33.83 11.28,25.91 14.02,25.91 U$7.B18
16_IO53  (via drill 0.35)
  Top 0.152: v48.77,82.45 48.77,80.92 U5.5 | v40.39,83.06 32.77,83.06 31.09,81.38 12.65,81.38 6.4,75.13 v6.4,69.04 | v6.1,28.19 11.43,22.86 14.02,22.86 U$7.B19
  Bottom 0.152: v48.77,82.45 41,82.45 v40.39,83.06 | v6.4,69.04 6.4,30.18 6.1,29.87 v6.1,28.19
16_IO54
  Top 0.152: U5.4 50.14,80.77 50.14,80.01 47.55,77.42 38.71,77.42 36.58,79.55 24.08,79.55 20.42,75.89 18.75,75.89 17.53,74.68 16.46,74.68 15.24,73.46 15.24,66.9 13.72,65.38 13.56,65.38 12.65,64.47 12.65,62.33 11.58,61.27 10.97,61.27 7.32,57.61 7.32,43.43 11.43,39.32 U$7.B20
16_IO55
  Top 0.152: U5.3 51.36,80.92 51.36,81.23 50.44,82.14 49.84,82.14 49.53,81.84 49.53,79.86 48.31,78.64 46.18,78.64 45.72,79.1 45.72,81.84 42.67,84.89 34.9,84.89 32.61,87.17 28.04,87.17 22.55,81.69 12.5,81.69 5.79,74.98 5.79,41.91 11.43,36.27 U$7.B21
16_IO56
  Top 0.152: U5.2 52.58,80.92 52.58,81.38 50.9,83.06 48.46,83.06 48.16,82.75 48.16,79.7 48.01,79.55 47.24,79.55 46.94,79.86 46.94,81.84 43.59,85.19 35.05,85.19 32.77,87.48 27.89,87.48 22.4,81.99 12.34,81.99 5.49,75.13 5.49,39.32 11.43,33.38 U$7.B22
16_IO57  (via drill 0.35)
  Top 0.152: v52.73,69.95 52.73,71.48 U5.23
  Bottom 0.152: v52.73,69.95 52.27,69.95 45.11,77.11 42.98,77.11 40.23,79.86 39.32,79.86 20.42,60.96 18.29,60.96 17.07,59.74 13.11,59.74 11.89,58.52 11.28,58.52 10.06,57.3 10.06,31.7 11.43,30.33 U$7.B23
16_IO58  (via drill 0.35)
  Top 0.152: v45.11,69.34 50.6,69.34 51.36,70.1 51.36,71.48 U5.22 | v37.49,64.16 37.49,63.7 38.56,62.64 38.56,62.18 38.86,61.87 v39.93,61.87 | v21.64,27.74 20.12,26.21 18.14,26.21 17.22,27.13 11.58,27.13 U$7.B24
  Bottom 0.152: v45.11,69.34 44.81,69.34 43.89,68.43 41.3,68.43 37.49,64.62 v37.49,64.16 | v39.93,61.87 39.93,61.42 40.69,60.66 40.69,51.05 36.27,46.63 36.27,36.73 34.44,34.9 34.44,28.35 33.83,27.74 v21.64,27.74
16_IO59  (via drill 0.35)
  Top 0.152: v50.29,69.95 50.29,71.48 U5.21 | v39.17,80.47 32.16,80.47 v31.85,80.77 | v22.1,83.52 9.75,83.52 2.74,76.5 2.74,28.5 11.12,20.12 11.89,20.12 12.65,20.88 12.65,21.79 11.89,22.55 10.82,22.55 5.49,27.89 5.49,28.5 5.79,28.8 7.01,28.8 11.43,24.38 U$7.B25
  Bottom 0.152: v50.29,69.95 51.82,69.95 52.43,69.34 53.03,69.34 53.34,69.65 53.34,70.26 46.18,77.42 43.13,77.42 40.08,80.47 v39.17,80.47 | v31.85,80.77 24.84,80.77 v22.1,83.52
16_IO60
  Top 0.152: U5.20 48.92,71.63 48.92,71.93 49.84,72.85 53.03,72.85 53.34,72.54 53.34,70.56 53.65,70.26 54.25,70.26 54.56,70.56 54.56,78.03 53.34,79.25 53.34,81.84 49.38,85.8 36.27,85.8 33.98,88.09 27.58,88.09 22.4,82.91 9.6,82.91 3.05,76.35 3.05,29.72 11.43,21.34 U$7.B26
16_SEL_1  (via drill 0.35)
  Top 0.152: U10.10 51.36,24.69 51.36,32.31 50.9,32.77 50.9,37.19 51.36,37.64 51.36,38.41 U4.10 51.36,38.56 v51.36,40.23 | v51.66,50.29 51.51,50.44 51.51,55.02 U8.10 51.51,55.17 51.51,55.93 51.97,56.39 51.97,65.38 51.82,65.53 51.82,66.45 51.36,66.9 v51.36,67.82 | v41.15,78.03 40.69,78.49 40.69,81.84 41,82.14 41.6,82.14 42.52,81.23 42.52,80.92 U5.10
  Bottom 0.152: v51.66,50.29 51.66,49.99 51.36,49.68 v51.36,40.23 53.19,38.41 69.04,38.41 70.56,36.88 70.56,31.7 68.58,29.72 U$2.D7 | v51.36,67.82 v41.15,78.03
16_SEL_2  (via drill 0.35)
  Top 0.152: U10.11 52.73,24.54 52.73,24.23 53.8,23.16 60.05,23.16 68.58,31.7 U$2.D8 | v43.74,78.03 41.3,80.47 41.3,80.77 U5.11 | v53.65,67.82 53.65,67.21 53.34,66.9 53.34,55.78 52.73,55.17 U8.11 52.73,55.02 53.34,54.41 53.34,46.79 52.73,46.18 52.73,38.56 U4.11 52.73,38.41 53.34,37.8 v53.34,37.03
  Bottom 0.152: v43.74,78.03 46.02,78.03 53.65,70.41 v53.65,67.82 | U$2.D8 68.58,32.31 70.26,33.98 70.26,34.59 69.04,35.81 54.56,35.81 v53.34,37.03
16_SEL_3  (via drill 0.35)
  Top 0.152: 52.58,35.51 52.58,37.03 52.12,37.49 52.12,47.24 52.58,47.7 U4.14 52.58,47.85 52.58,50.29 52.12,50.75 52.12,56.08 52.58,56.54 52.58,64.31 U8.14 52.58,64.47 52.43,64.62 v52.43,66.6 | 52.58,35.51 52.58,33.98 U10.14 | v50.29,66.6 48.62,68.28 43.74,68.28 41.3,70.71 41.3,71.48 U5.14 | 52.58,35.51 v52.88,35.51
  Bottom 0.152: v52.43,66.6 v50.29,66.6 | U$2.D9 54.1,34.29 v52.88,35.51
16_SEL_4  (via drill 0.35)
  Top 0.152: 54.56,36.88 54.1,36.42 54.1,33.98 U10.13 | 54.56,36.88 54.56,47.24 54.1,47.7 U4.13 | 54.1,66.45 54.1,64.47 U8.13 | 54.1,66.45 54.56,66.9 55.17,66.9 55.47,66.6 55.47,54.25 55.17,53.95 55.17,47.4 65.68,36.88 68.58,36.88 U$2.D10 | v42.52,67.82 40.08,70.26 40.08,71.48 U5.13 | 54.1,66.45 v53.95,66.6 | v54.86,36.88 54.56,36.88
  Bottom 0.152: v42.52,67.82 46.63,67.82 47.4,67.06 49.84,67.06 49.99,67.21 53.34,67.21 v53.95,66.6 | v54.86,36.88 68.58,36.88 U$2.D10
D11  (via drill 0.35)
  Top 0.152: U2.6 30.63,58.52 30.63,59.59 U2.5 | v33.07,63.4 33.07,64.47 35.36,66.75 35.36,69.8 U1.8 | v32.16,59.89 30.79,59.89 30.63,59.74 U2.5 | U2.5 30.48,59.74 29.72,59.74 28.5,60.96 28.5,74.98 29.72,76.2 U1.2 30.63,76.2 31.24,76.81 v33.53,76.81 | v59.13,74.98 59.13,46.48 62.79,42.82 63.55,42.82 66.9,39.47 68.58,39.47 U$2.D11
  Bottom 0.152: v33.07,63.4 33.07,60.81 v32.16,59.89 | v59.13,74.98 45.57,88.54 44.96,88.54 38.25,81.84 38.25,81.53 v33.53,76.81
D12  (via drill 0.35)
  Top 0.152: 30.63,64.77 30.63,63.55 U2.2 | 30.63,64.77 30.63,67.06 32.77,69.19 32.77,71.78 32.16,72.39 U1.5 30.48,72.39 29.87,73 v29.11,73 | 30.63,64.77 U2.1 | v28.96,76.35 30.02,77.42 30.48,77.42 U1.1 | U$2.D12 68.58,50.14 66.9,51.82 66.9,60.05 68.12,61.27 69.65,61.27 70.26,61.87 v70.26,69.19
  Bottom 0.152: v29.11,73 28.96,73.15 v28.96,76.35 30.33,76.35 46.48,92.51 51.66,92.51 51.82,92.35 51.82,91.75 62.03,81.53 69.04,81.53 70.26,80.31 v70.26,69.19
D12|D11  (via drill 0.35)
  Top 0.152: v37.49,72.85 36.73,73.61 35.51,73.61 U1.11 | v38.71,72.54 38.71,70.71 v41.6,67.82 | v42.82,66.6 43.13,66.6 44.5,65.23 44.5,63.09 v49.53,58.06 | v49.53,44.04 49.53,42.22 v50.14,41.6 | v51.51,36.88 51.51,33.98 U10.15
  Bottom 0.152: v37.49,72.85 38.41,72.85 v38.71,72.54 | v42.82,66.6 v41.6,67.82 | v49.53,44.04 v49.53,58.06 | v50.14,41.6 50.14,38.25 v51.51,36.88
GND  (via drill 0.35)
  Top 0.152: U$2.GND 83.82,9.45 95.86,21.49 95.86,30.63 | U2.7 30.94,57.15 32.77,58.98 32.77,60.2 32.46,60.5 31.7,60.5 31.55,60.35 29.57,60.35 28.96,60.96 28.96,71.17 29.41,71.63 31.7,71.63 31.85,71.48 | 31.85,71.48 31.85,70.71 31.09,69.95 30.63,69.95 U1.7 | v39.62,79.25 39.93,79.55 39.93,80.77 U5.12 | 31.85,71.48 v32.16,71.48 | 53.95,32.16 53.95,32.31 53.34,32.92 53.34,35.05 53.8,35.51 53.8,36.58 53.95,36.73 53.95,38.41 U4.12 | 53.95,32.16 53.95,25.91 | 53.95,25.91 53.95,24.69 U10.12 | 53.95,32.16 55.47,33.68 55.47,37.19 54.86,37.8 54.86,48.62 54.1,49.38 54.1,55.02 U8.12 54.1,55.17 54.86,55.93 v54.86,66.29 | v51.05,16.31 51.05,22.55 52.12,23.62 52.12,25.6 52.43,25.91 53.95,25.91 | v54.1,7.01 57.15,10.06 U3.8
  Bottom 0.152: v39.62,79.25 39.32,79.25 32.16,72.08 v32.16,71.48 32.16,67.21 36.73,62.64 37.34,62.64 40.08,65.38 45.87,65.38 46.48,65.99 54.56,65.99 v54.86,66.29 | v51.05,16.31 57.15,10.21 U3.8 | 50.9,3.81 v54.1,7.01 54.41,7.32 69.65,7.32 70.26,6.71 78.49,6.71 79.86,5.33 84.73,5.33 85.5,6.1 85.5,6.71 83.82,8.38 U$2.GND
NAND(D11,D12)
  Top 0.152: U1.3 30.63,74.98 33.83,74.98 34.29,75.44 38.1,75.44 40.39,73.15 41.76,73.15 42.52,72.39 42.52,71.63 U5.15
NAND(D12,~D11)  (via drill 0.35)
  Top 0.152: v33.38,71.63 31.39,73.61 30.63,73.61 U1.4 | v50.14,74.83 v42.52,74.83 | v57.3,67.67 57.3,62.03 56.08,60.81 v56.08,53.49 | v51.97,49.38 51.97,48.31 51.51,47.85 U4.15
  Bottom 0.152: v33.38,71.63 33.38,70.26 37.03,66.6 37.64,66.6 37.95,66.9 37.95,67.67 36.58,69.04 36.58,75.44 38.41,77.27 40.08,77.27 v42.52,74.83 | v57.3,67.67 v50.14,74.83 | v51.97,49.38 v56.08,53.49
NAND(~D12,D11)  (via drill 0.35)
  Top 0.152: U1.10 35.81,72.39 37.49,70.71 v37.49,69.49 | v44.04,69.49 44.96,68.58 49.23,68.58 51.36,66.45 51.36,64.47 U8.15
  Bottom 0.152: v44.04,69.49 v37.49,69.49
RX
  Top 0.152: U$2.TX0 68.58,6.86 71.48,9.75 71.48,38.56 70.26,39.78 70.26,52.88 68.58,54.56
TX
  Bottom 0.152: 68.58,52.12 70.26,53.8 70.26,56.54 72.24,58.52 74.52,58.52 75.29,57.76 75.29,50.44 76.81,48.92 76.81,12.8 73,8.99 68.58,8.99 U$2.RX1
VCC
  Bottom 0.152: U$2.RAW 83.82,6.86 82.14,8.53 | 82.14,8.53 82.14,50.29 83.82,51.97 | 24.23,8.84 30.02,8.84 31.24,7.62 72.39,7.62 73.3,8.53 82.14,8.53
~D11
  Top 0.152: U1.6 30.48,71.02 30.02,71.02 29.26,70.26 29.26,61.87 30.18,60.96 U2.4 31.55,60.96 33.68,63.09 33.68,64.62 38.1,69.04 38.1,73.15 36.42,74.83 35.51,74.83 U1.12
~D12
  Top 0.152: 35.05,71.02 32.77,68.73 32.77,64.01 31.09,62.33 30.63,62.33 U2.3 | 35.05,71.02 35.36,71.02 U1.9 35.05,71.02 | U1.13 32.16,76.2 31.39,75.44 29.41,75.44 29.26,75.29 29.26,74.52 29.57,74.22 31.85,74.22 35.05,71.02